# Allegro board NCE_L2-L4_osc_BK-20251113.brd
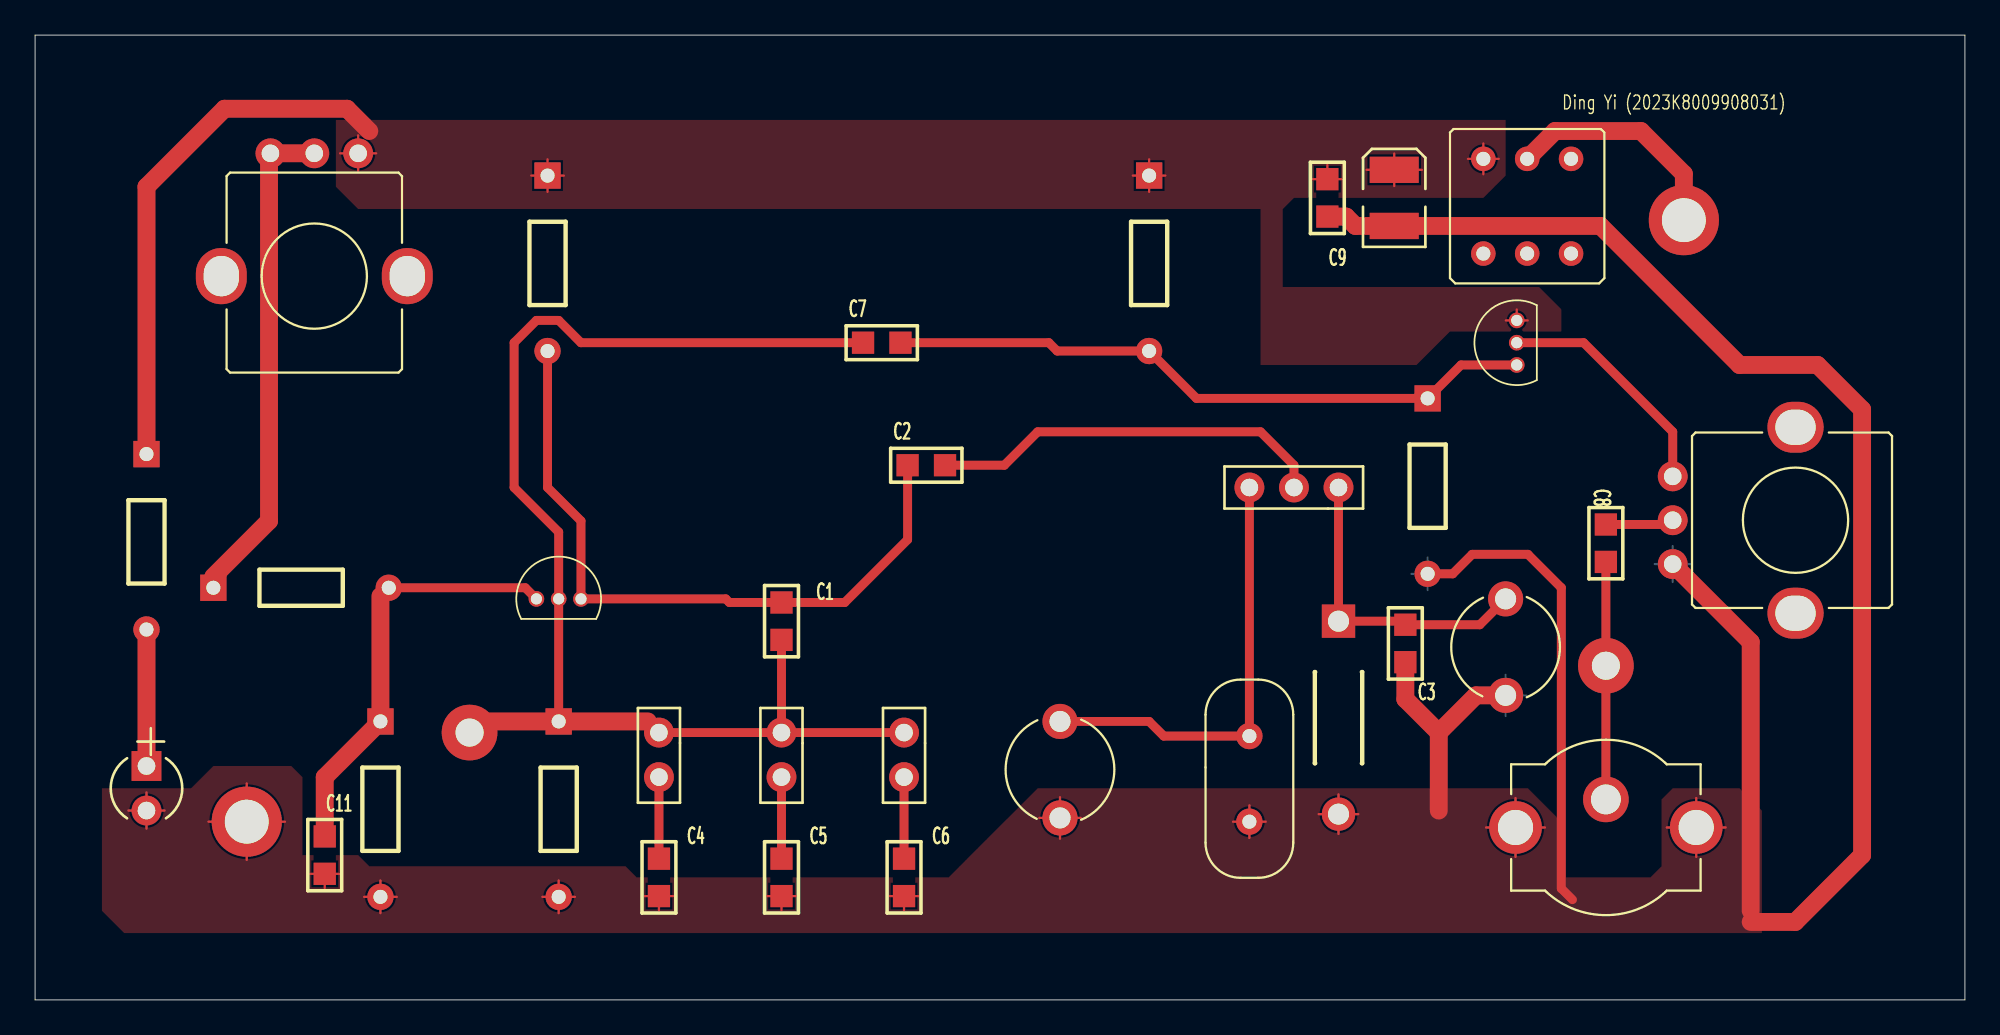
[diagram p0: board, top side]
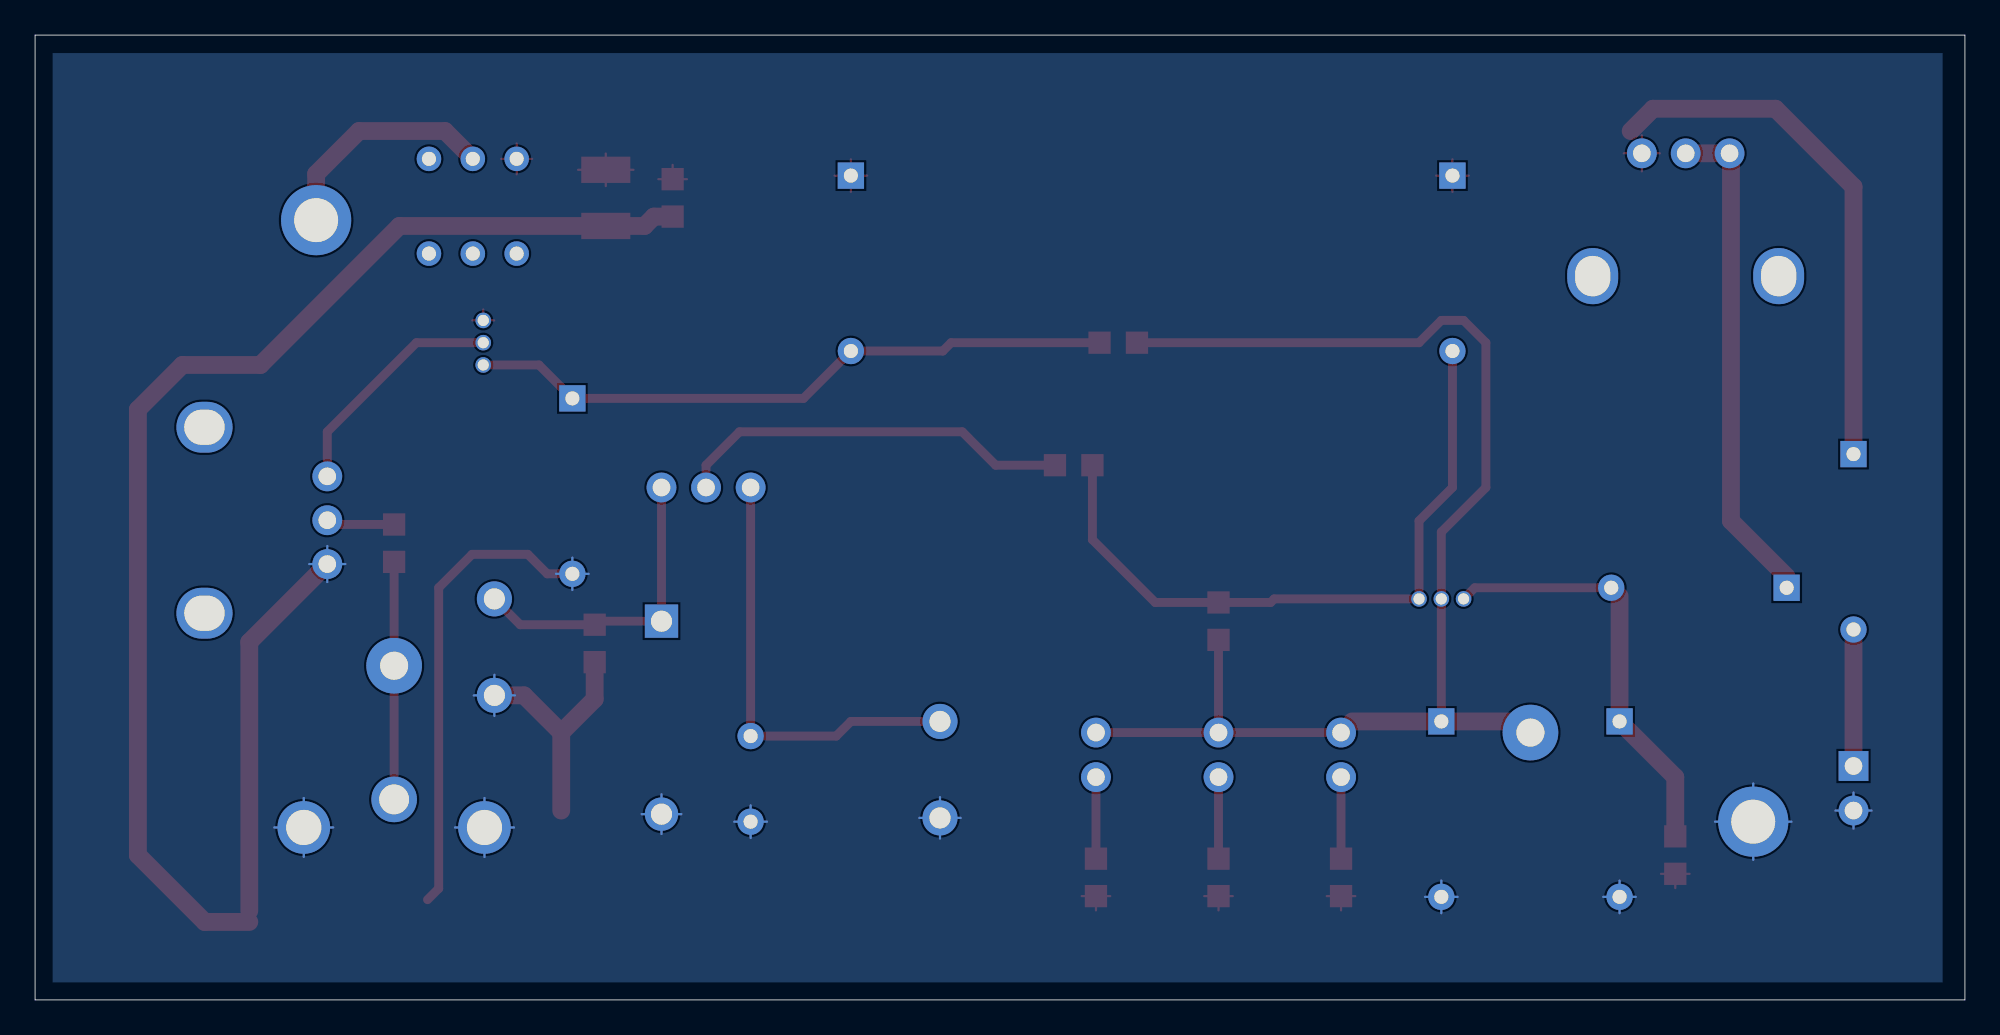
[diagram p1: board, bottom side, seen from below]

Outline 110 x 55 mm; copper layers: TOP, BOTTOM. Coordinates in mm from the lower left corner of the outline.
Outline path: 0,55 110,55 110,0 0,0 0,55

## Placement (name value [footprint] x y rotation side)
C1  100pF  [C0805]  42.55 21.59 270 top
C2  30pF  [C0805]  50.8 30.48 0 top
C3  75pF  [C0805]  78.11 20.32 270 top
C4  100pF  [C0805]  35.56 6.99 270 top
C5  200pF  [C0805]  42.55 6.99 270 top
C6  200pF  [C0805]  49.53 6.99 270 top
C7  10nF  [C0805]  48.26 37.47 0 top
C8  10nF  [C0805]  89.53 26.04 270 top
C9  330nF/50V  [C0805]  73.66 45.72 270 top
C10  22uF/50V  [CP3528]  77.47 45.72 270 top
C11  10nF/50V  [C0805]  16.51 8.26 270 top
CV1  5/25P  [CAP_W]  58.42 15.88 270 top
CV2  5/20P  [CAP_W]  83.82 22.86 270 top
H1  HOLE  [TPAD]  93.98 44.45 0 top
H2  HOLE  [TPAD]  12.06 10.16 0 top
J1  -  [JUMPER_3]  74.3 29.21 180 top
J3  -  [JUMPER_2]  35.56 15.24 270 top
J4  -  [JUMPER_2]  42.55 15.24 270 top
J5  -  [JUMPER_2]  49.53 15.24 270 top
JZ  10.245MHz  [JZ]  69.22 10.16 90 top
K1  -  [KEY]  82.55 42.55 0 top
L  2.2uH  [IND]  74.3 21.59 270 top
LED  LED_P2  [LED]  6.35 12.06 270 top
OUT  M-HOLE  [RCA]  89.53 11.43 0 top
R1  15K  [RES]  10.16 23.5 0 top
R2  8.7K  [RES]  19.68 15.88 270 top
R3  8.3K  [RES]  29.21 46.99 270 top
R4  1K  [RES]  29.84 15.88 270 top
R5  20K  [RES]  63.5 46.99 270 top
R6  10K  [RES]  79.38 34.29 270 top
R7  2K  [RES]  6.35 31.11 270 top
T1  9018  [TO92]  28.57 22.86 90 top
T2  9018  [TO92]  84.45 36.2 180 top
TP1  TP-TH-C  [TP]  24.77 15.24 0 top
TP2  TP-TH-C  [TP]  89.53 19.05 0 top
W1  22K  [RES_3]  18.41 48.26 180 top
W2  680R  [RES_3]  93.34 29.84 270 top

## Library data of the parts
C1-C9 C11 = CAP
C10 = CAP+
CV1 CV2 = CAP+_0
H1 H2 = CON3_3
J1 = JUMPER_3
J3-J5 = JUMPER_2
JZ = XTAL_P2
K1 = KEY_0
L = Inductor_P2
LED = LED_P2
OUT = M-HOLE_1
R1-R7 = RES
T1 T2 = NPN_3P
TP1 TP2 = TP-TH-C
W1 W2 = RES_3

## Footprints (pads in the part's own frame, mm; a bottom-side part is the same pattern mirrored in y, then rotated)
C0805
  rect 1.27x1.27 smd: 1(-1.067,0) 2(1.067,0)
CAP_W
  round 2 hole 1.2: 1(0,0) 2(5.5,0)
CP3528
  rect 1.5x2.8 smd: 1(-1.6,0) 2(1.6,0)
IND
  rect 1.9x1.9 hole 1.2: 1(0,0)
  round 1.9 hole 1.2: 2(11,0)
JUMPER_2
  round 1.7 hole 1: 1(0,0) 2(2.54,0)
JUMPER_3
  round 1.7 hole 1: 1(0,0) 2(5.08,0) 3(2.54,0)
JZ
  round 1.5 hole 0.8: 1(0,0) 2(4.88,0)
KEY
  round 1.4 hole 0.8: 1(0,0) 2(2.5,0) 3(5,0) 4(5,5.4) 5(2.5,5.4) 6(0,5.4)
LED
  rect 1.7x1.7 hole 1: 1(-1.27,0)
  round 1.7 hole 1: 2(1.27,0)
RCA
  round 2.6 hole 1.7: 1(0,0)
  round 3 hole 2: 2(-5.15,-1.6) 3(5.15,-1.6)
RES
  rect 1.5x1.5 hole 0.8: 1(0,0)
  round 1.5 hole 0.8: 2(10,0)
RES_3
  oval 2.9x3.2 hole 2x2.3: (-2.8,7) (7.8,7)
  round 1.7 hole 1: 1(0,0) 2(2.5,0) 3(5,0)
TO92
  round 0.889 hole 0.635: 1(0,0) 2(0,-1.27) 3(0,-2.54)
TP
  round 3.175 hole 1.6: 1(0,0)
TPAD
  round 4 hole 2.5: 1(0,0)

## Nets
+12V: H1.1 K1.5
GND: C3.2 C4.2 C5.2 C6.2 C9.2 C10.2 C11.2 CV1.2 CV2.2 H2.1 JZ.1 L.2 LED.2(CATHODE) OUT.2 OUT.3 R2.2 R4.2 R6.2 W2.3
N00182: C9.1 C10.1 K1.6 R3.1 R5.1 R7.1 T2.3(C) W1.1
N00688: T2.2(E) W2.1
N00696: C8.2 OUT.1 TP2.1(.)
N00783: C7.2 R5.2 R6.1 T2.1(B)
N01456: C3.1 CV2.1 J1.1 L.1
N01491: CV1.1 J1.2 JZ.2
N01808: C4.1 J3.2
N01812: C5.1 J4.2
N01816: C6.1 J5.2
N02155: C2.2 J1.3
N02167: C1.1 C2.1 R3.2 T1.3(C)
N02183: C1.2 C7.1 J3.1 J4.1 J5.1 R4.1 T1.2(E) TP1.1(.)
N02893: R1.1 W1.2 W1.3
N02910: C11.1 R1.2 R2.1 T1.1(B)
N03203: LED.1(ANODE) R7.2
N10022: C8.1 W2.2

Pads without a net: K1 1 2 3 4

## Routing (per net, layer and track width the routed paths; a pad name or vN(x,y) marks a point on that pad's centre or on a via; arc(x,y) is an arc through that point)
+12V: length 13.2
  TOP w1.016: H1.1 93.98,47.08 91.53,49.53 86.64,49.53 K1.5
GND: length 246.3
  TOP w0.127: 49.53,5.11 C6.2 ; C6.2 48.72,5.92 ; C6.2 50.34,5.92 ; 16.51,6.38 C11.2 ; C11.2 15.7,7.19 ; C11.2 17.32,7.19 ; 5.32,10.79 LED.2 ; LED.2 7.38,10.79 ; LED.2 6.35,9.77 ; LED.2 6.35,11.82 ; C5.2 43.36,5.92 ; C5.2 41.73,5.92 ; C5.2 42.55,5.11 ; JZ.1 69.22,11.09 ; JZ.1 70.14,10.16 ; JZ.1 69.22,9.23 ; JZ.1 68.29,10.16 ; 18.76,5.87 R2.2 ; R2.2 20.61,5.87 ; R2.2 19.68,4.95 ; R2.2 19.68,6.8 ; OUT.2 84.38,11.51 ; OUT.2 82.71,9.83 ; OUT.2 86.06,9.83 ; OUT.2 84.38,8.15 ; L.2 74.3,11.72 ; L.2 75.42,10.59 ; L.2 74.3,9.46 ; L.2 73.17,10.59 ; 93.01,9.83 OUT.3 ; OUT.3 96.36,9.83 ; OUT.3 94.69,8.15 ; OUT.3 94.69,11.51 ; 28.92,5.87 R4.2 ; R4.2 30.77,5.87 ; R4.2 29.84,4.95 ; R4.2 29.84,6.8 ; 34.75,5.92 C4.2 ; C4.2 35.56,5.11 ; C4.2 36.37,5.92 ; 57.24,10.38 CV1.2 ; CV1.2 59.6,10.38 ; CV1.2 58.42,9.2 ; CV1.2 58.42,11.55 ; 12.06,7.98 H2.1 ; H2.1 12.06,12.34 ; H2.1 9.89,10.16 ; H2.1 14.24,10.16
  TOP w0.508: 87.63,5.71 87,6.35 87,23.5 85.09,25.4 81.92,25.4 80.8,24.29 R6.2
  TOP w1.016: 97.79,5.08 97.79,20.4 W2.3 ; 80.01,15.24 80.01,10.79 ; 80.01,15.24 82.13,17.36 CV2.2 ; 80.01,15.24 78.11,17.14 C3.2 ; 97.79,4.45 100.33,4.45 104.14,8.26 104.14,33.66 101.6,36.2 97.16,36.2 89.23,44.12 C10.2 75.26,44.12 74.73,44.65 C9.2
  BOTTOM w0.127: 92.32,24.85 W2.3 ; W2.3 93.34,25.87 ; W2.3 93.34,23.82 ; W2.3 94.37,24.85 ; OUT.3 96.36,9.83 ; OUT.3 94.69,8.15 ; OUT.3 93.01,9.83 ; OUT.3 94.69,11.51 ; 79.38,23.36 R6.2 ; R6.2 78.45,24.29 ; R6.2 80.3,24.29 ; R6.2 79.38,25.22 ; L.2 74.3,11.72 ; L.2 75.42,10.59 ; L.2 73.17,10.59 ; L.2 74.3,9.46 ; 82.71,9.83 OUT.2 ; OUT.2 86.06,9.83 ; OUT.2 84.38,8.15 ; OUT.2 84.38,11.51 ; 57.24,10.38 CV1.2 ; CV1.2 58.42,11.55 ; CV1.2 59.6,10.38 ; CV1.2 58.42,9.2 ; 69.22,9.23 JZ.1 ; JZ.1 69.22,11.09 ; JZ.1 68.29,10.16 ; JZ.1 70.14,10.16 ; CV2.2 85,17.36 ; CV2.2 82.64,17.36 ; CV2.2 83.82,16.18 ; CV2.2 83.82,18.54 ; R2.2 19.68,6.8 ; R2.2 20.61,5.87 ; R2.2 19.68,4.95 ; R2.2 18.76,5.87 ; R4.2 30.77,5.87 ; R4.2 29.84,6.8 ; R4.2 28.92,5.87 ; R4.2 29.84,4.95 ; 5.32,10.79 LED.2 ; LED.2 6.35,11.82 ; LED.2 6.35,9.77 ; LED.2 7.38,10.79 ; H2.1 14.24,10.16 ; H2.1 12.06,12.34 ; H2.1 12.06,7.98 ; H2.1 9.89,10.16
N00182: length 54.7
  TOP w0.127: 63.5,46.06 R5.1 ; R5.1 62.57,46.99 ; R5.1 64.43,46.99 ; R5.1 63.5,47.92 ; T2.3 84.45,39.36 ; T2.3 83.83,38.73 ; T2.3 85.08,38.73 ; K1.6 83.43,47.94 ; K1.6 82.55,47.07 ; K1.6 81.67,47.94 ; K1.6 82.55,48.82 ; C10.1 79.05,47.32 ; C10.1 77.47,48.25 ; C10.1 77.47,46.39 ; C10.1 75.89,47.32 ; 28.28,46.99 R3.1 ; R3.1 30.14,46.99 ; R3.1 29.21,46.06 ; R3.1 29.21,47.92 ; 72.85,46.79 C9.1 ; C9.1 74.47,46.79 ; C9.1 73.66,47.6 ; W1.1 18.41,49.29 ; W1.1 17.39,48.26 ; W1.1 19.44,48.26 ; W1.1 18.41,47.23
  TOP w1.016: 19.05,49.53 17.78,50.8 10.79,50.8 6.35,46.35 R7.1
N00688: length 13.5
  TOP w0.508: T2.2 88.27,37.47 93.34,32.38 W2.1
N00696: length 13.5
  TOP w0.508: C8.2 TP2.1 OUT.1
N00783: length 37.2
  TOP w0.508: C7.2 57.78,37.47 58.26,36.99 R5.2 66.2,34.29 R6.1 81.28,36.2 T2.1
N01456: length 17.8
  TOP w0.203: 77.9,21.59 C3.1
  TOP w0.508: CV2.1 82.35,21.39 C3.1 ; 77.9,21.59 L.1 J1.1
N01491: length 25.3
  TOP w0.508: J1.2 JZ.2 64.33,15.04 63.5,15.88 CV1.1
N01808: length 4.6
  TOP w0.508: J3.2 C4.1
N01812: length 4.6
  TOP w0.508: J4.2 C5.1
N01816: length 4.6
  TOP w0.508: J5.2 C6.1
N02155: length 22.7
  TOP w0.508: C2.2 55.24,30.48 57.15,32.38 69.85,32.38 71.75,30.48 J1.3
N02167: length 39.3
  TOP w0.508: R3.2 29.21,29.21 31.11,27.3 T1.3 39.37,22.86 39.57,22.66 C1.1 46.15,22.66 49.73,26.24 C2.1
N02183: length 74.2
  TOP w0.203: 25.4,15.88 TP1.1 ; 34.92,15.88 J3.1
  TOP w0.508: R4.1 T1.2 29.84,26.67 27.3,29.21 27.3,37.47 28.57,38.73 29.84,38.73 31.11,37.47 C7.1 ; J5.1 J4.1 ; J4.1 J3.1 ; J4.1 C1.2
  TOP w1.016: 25.4,15.88 R4.1 34.92,15.88
N02893: length 28.6
  TOP w0.203: 13.34,48.18 W1.3 ; R1.1 10.16,24.13
  TOP w1.016: W1.2 W1.3 ; 13.34,48.18 13.34,27.3 10.16,24.13
N02910: length 24.4
  TOP w0.203: 19.68,23.02 R1.2
  TOP w0.508: T1.1 27.94,23.5 R1.2
  TOP w1.016: 19.68,23.02 R2.1 16.51,12.7 C11.1
N03203: length 7.8
  TOP w1.016: 6.35,13.34 R7.2
N10022: length 3.9
  TOP w0.203: 93.1,27.1 W2.2
  TOP w0.508: C8.1 93.1,27.1

## Copper pours and planes (outline as drawn; the poured copper is in the pictures)
GND on TOP: 3.81,12.06 8.89,12.06 10.16,13.34 14.61,13.34 15.24,12.7 15.24,8.26 18.41,8.26 19.05,7.62 33.66,7.62 34.29,6.99 52.07,6.99 57.15,12.06 85.09,12.06 87,10.16 87,6.99 92.08,6.99 92.71,7.62 92.71,11.43 93.34,12.06 97.16,12.06 98.42,10.79 98.42,3.81 5.08,3.81 3.81,5.08
GND on BOTTOM: 1.27,1 1.27,53.98 109,53.98 109,1
N00182 on TOP: 17.14,50.16 17.14,46.35 18.41,45.09 69.85,45.09 69.85,36.2 78.74,36.2 80.64,38.1 87,38.1 87,39.37 85.72,40.64 71.12,40.64 71.12,45.09 71.75,45.72 82.55,45.72 83.82,46.99 83.82,50.16

## Text on the board
Ref Des/Silkscreen Top: Ding Yi (2023K8009908031)
